# Altium PCB TST.PcbDoc
Units mm, origin at the board's own origin, x right, y up, seen from the top; angles counter-clockwise.
Board outline 25 x 25 mm, 2 copper layers (Top Layer, Bottom Layer), stack 0.266 mm thick; 5 components, 22 nets, 16 pads, 33 vias.
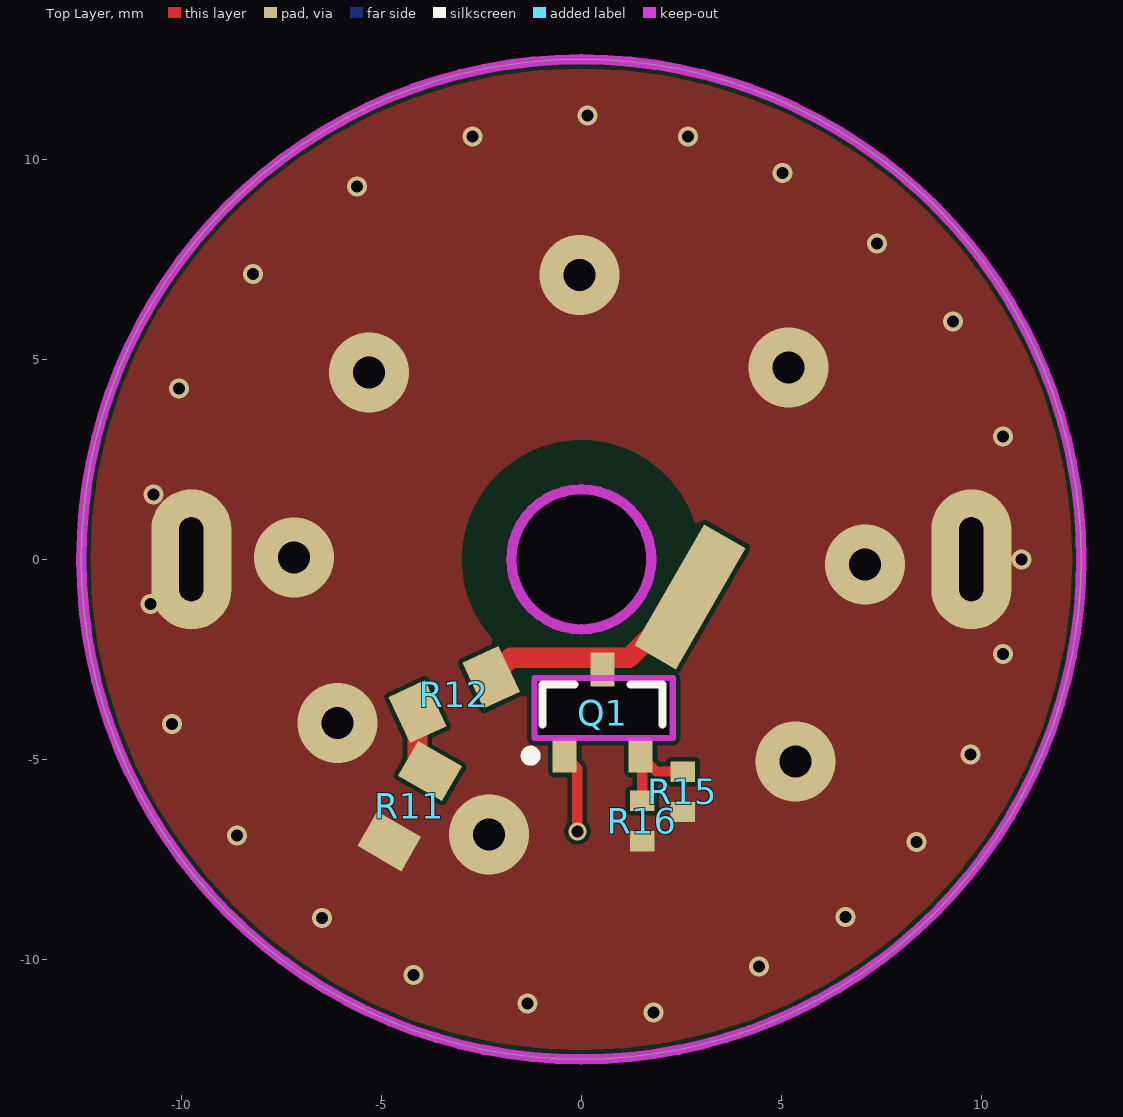
[diagram p0: Top Layer view]
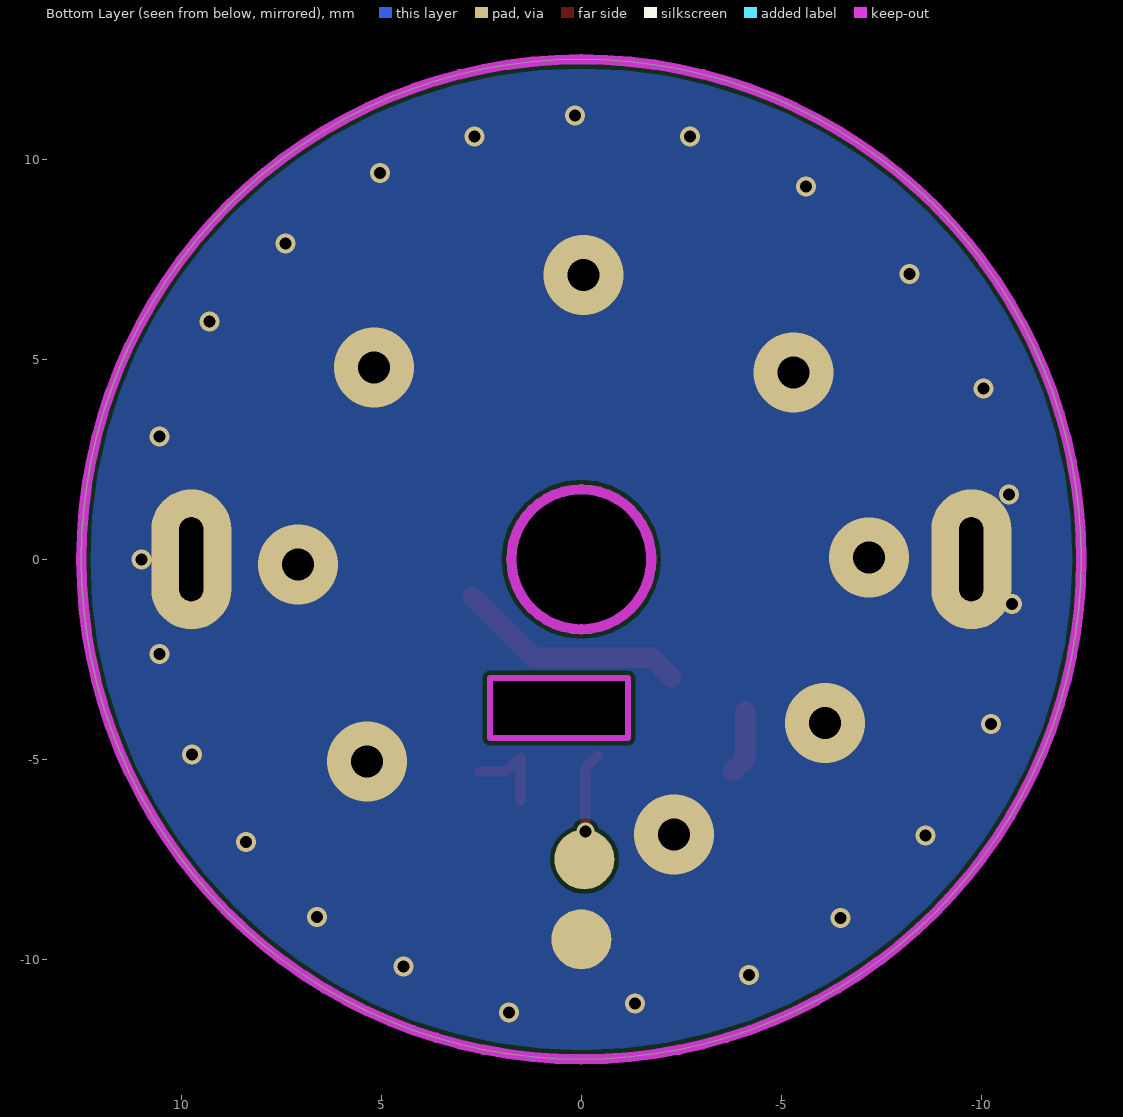
[diagram p1: Bottom Layer view, seen from below]

## Layer stack, top to bottom
Top Solder: solder mask 0.0102, Solder Resist, Dk 3.5
Top Layer: signal copper 0.0356
Dielectric1: core 0.195, FR-4, Dk 4.2
Bottom Layer: signal copper 0.0356
Bottom Solder: solder mask 0.0102, Solder Resist, Dk 3.5

## Board outline
0,-12.5 cw(c0,0) -12.5,0 cw(c0,0) 0,12.5 cw(c0,0) 12.5,0 cw(c0,0)
cut-out: -1.168,-4.47 2.286,-4.47 2.286,-2.972 -1.168,-2.972
cut-out: 0,-1.75 cw(c0,0) -1.75,0 cw(c0,0) 0,1.75 cw(c0,0) 1.75,0 cw(c0,0)

## Design rules (kind name [scope] priority, off if disabled: settings)
Clearance Clearance_1 [InNetClass('50R') vs InPolygon] p1: gap=0.508 ignorepadtopadclearanceinfootprint=FALSE except(0: Arc-Hole Track-Hole SMDPad-Hole THPad-Hole Via-Hole Fill-Hole Poly-Hole Region-Hole Text-Hole)
Clearance [All] p2: gap=0.102 ignorepadtopadclearanceinfootprint=FALSE
DiffPairsRouting [All] p1: maxlimit=0.254 minlimit=0.152 mostfreqgap=0.152 toplayer_minwidth=0.152 toplayer_maxwidth=0.381 toplayer_prefwidth=0.152 bottomlayer_minwidth=0.152 bottomlayer_maxwidth=0.381 bottomlayer_prefwidth=0.152 maxuncoupledlength=12.7
FanoutControl Fanout_Default [All] p5: bgadir=Out bgaviamode=Closest fanoutstyle=Auto fanoutdirection=Alternating viagrid=0.025 // Fanout_Default (Default Rule)
MinimumSolderMaskSliver [All] p1 off: minsoldermaskwidth=0.254
PlaneClearance [All] p1: clearance=0.152
PlaneConnect [All] p1: planeconnectstyle=Direct reliefexpansion=0.508 reliefentries=4 reliefconductorwidth=0.254 reliefairgap=0.254
PolygonConnect [All] p1: connectstyle=Direct reliefconductorwidth=0.254 reliefentries=4 polygonreliefangle="90 Angle" airgapwidth=0.254
RoomDefinition PSRR [InComponentClass('PSRR')] p1 off: confinementstyle=ConfineIn formatcopy=TRUE lockcomponents=FALSE outline 6.295,12.093 92.401,12.093 92.401,16.614 6.295,16.614
RoutingVias [All] p1: holewidth=0.2 width=0.45 viastyle="Through Hole" minholewidth=0.2 minwidth=0.45 maxholewidth=0.508 maxwidth=1.27
SilkToSilkClearance [All] p1 off: silktosilkclearance=0.254
SilkToSolderMaskClearance [IsPad] p1 off: minsilkscreentomaskgap=0.254 clearancetoexposedcopper=TRUE
SolderMaskExpansion [All] p1 off: expansion=0.076
Width Width_1 [InNet('3.3') or InNet('GND')] p1: maxlimit=5.08 minlimit=0.089 preferedwidth=0.089
Width [All] p2: maxlimit=2.54 minlimit=0.089 preferedwidth=0.089
23 further rules are at their usual default settings.

## Classes and differential pairs
component class PSRR: T6 U29

## Components (designator, comment, footprint, x,y, rotation, side; value= is the part's Value field where it differs from the comment)
Q1 "JFET-N" SOT-23_L 0.533,-3.835 r90 top
R11 "1k" 0805 -4.293,-6.172 r240 top
R12 "1k" 0805 -3.175,-3.378 r25 top (schematic designator R11)
R15 "10k" 0402 2.54,-5.817 r90 top value=0Ohm
R16 "10k" 0402 1.524,-6.545 r90 top value=0Ohm (schematic designator R15)

## Footprints (in the part's own frame and the unit in brackets; to place one, negate y for a bottom-side part, rotate by r counter-clockwise, add the part's x,y. Pads: shape width x height; smd on the part's side, far side on the other; paste and mask are expansions set on the pad)
0402 [mil] "0402-RES"
  rect 20x24 smd: 1(-19.69,0) 2(20,0)
0805 [mm]
  rect 1x1.27 smd: 1(-1.016,0) 2(1.016,0)
  body extent -1.27,-0.76 1.27,0.76, height 0.8
SOT-23_L [mm] "SOT23, 3-Leads, Body 2.9x1.3mm, Pitch 0.95mm, Lead Span 2.5mm, IPC High Density"
  rect 0.85x0.6 smd: 1(-1.075,0.95) 2(-1.075,-0.95) 3(1.075,0)
  silkscreen extent -1.2,-1.5 0.7,1.92, body extent -0.7,-1.5 0.7,1.5, height 1.1

## Part data
Q1: "N-Channel JFET", Code_JEDEC=TO-254-AA, LatestRevisionDate=17-Jul-2002, LatestRevisionNote="Re-released for DXP Platform.", PackageReference=TO-254-AA, Published=8-Jun-2000, Publisher="Altium Limited"
R11 R12 R15 R16: library part Res2, "Resistor", LatestRevisionDate=17-Jul-2002, LatestRevisionNote="Re-released for DXP Platform.", PackageDescription="Axial Device, Thru-Hole; 2 Leads; 0.4 in Pin Spacing", PackageReference=AXIAL-0.4, Published=8-Jun-2000, Publisher="Altium Limited"

## Free pads (board coordinates)
  oval 2x3.5 hole 0.6 slot 2.1 at 90 deg: 0(-9.75,0) 0(9.75,0)
  rect 1.2x3.5 smd rot 150: 1(2.718,-0.94)
  round 1.5 smd far side: 2(-0.076,-7.5) 3(0,-9.5)

## Via types
v1: diameter 0.5, hole 0.3, Top Layer to Bottom Layer, tented both sides, 24 vias
v2: diameter 2, hole 0.8, Top Layer to Bottom Layer, tented both sides, 8 vias
v3: diameter 0.45, hole 0.3, Top Layer to Bottom Layer, 1 vias

## Nets (pads, with @x,y where several pads share a name; then routed paths per layer and width w, separated by ;. In a path a pad name is that pad's centre, name@x,y a point inside that pad or via, vN(x,y) a via of type N, cw(c..) or ccw(c..) an arc to the next point about the centre after c; other vN are vias at no path point)
5V: 
D0-15: pad.2 Q1.1 | length 2
  Top Layer w0.254: Q1.1 -0.1,-5.227 v3(-0.1,-6.8)
D16-32: 
G1: pad.1 Q1.3 R12.2 | length 5.8
  Top Layer w0.508: R12.2 -1.769,-2.464 1.194,-2.464 pad.1
G2: 
GND: pad.0 pad.3 R11.2 R15.1 R16.1
  other v1: 1.803,-11.328 -1.346,-11.1 -4.191,-10.389 4.445,-10.185 -6.477,-8.966 6.604,-8.941 8.382,-7.061 -8.611,-6.909 9.728,-4.877 -10.236,-4.115 10.541,-2.362 -10.77,-1.118 11,0 -10.693,1.626 10.541,3.073 -10.058,4.267 9.296,5.944 -8.204,7.137 7.391,7.899 -5.613,9.322 5.029,9.652 -2.718,10.566 2.667,10.566 0.152,11.1
  other v2: -2.311,-6.883 5.359,-5.055 -6.096,-4.089 7.087,-0.127 -7.188,0.051 -5.309,4.674 5.182,4.801 -0.051,7.112
NetC2_2: R11.1 R12.1 | length 1.6
  Top Layer w0.508: R12.1 -4.096,-4.981 R11.1
NetC3_2: 
NetC6_2: 
NetC10_1: 
NetC12_1: 
NetC13_2: 
NetC23_2: 
NetOP2_2: 
NetOP2_8: 
NetOP2_13: 
PSRR_IN: Q1.2 R15.2 R16.2 | length 2.2
  Top Layer w0.254: R16.2 1.524,-4.951 1.882,-5.309 R15.2
PSRR_OUT: 
USB: 
USB3: 
VCC: 
VREF: 

## Polygon pours and split planes (outlines as drawn)
GND on Bottom Layer "GND_L02_P012" (solid, remove dead copper, pour order 12): 0,-12.5 cw(c0,0) -12.5,0 cw(c0,0) 0,12.5 cw(c0,0) 12.5,0 cw(c0,0)
GND on Top Layer "GND_L01_P010" (solid, remove dead copper, pour order 10): 0,-12.5 cw(c0,0) -12.5,0 cw(c0,0) 0,12.5 cw(c0,0) 12.5,0 cw(c0,0)

## Keep-outs
Keep-Out Layer:
  circle w0.254: c0,0 r1.75
  circle w0.254: c0,0 r12.5
  lines w0.152: -1.168,-4.47 2.286,-4.47 2.286,-2.972 -1.168,-2.972 -1.168,-4.47

## Other copper
Top Layer:
  pour cut-out: 0,-2.973 cw(c0,0) -2.973,0 cw(c0,0) 0,2.973 cw(c0,0) 2.973,0 cw(c0,0)

## Silkscreen, mask and mechanical layers (free items; w line width, h text height)
Top Solder:
  circle w2: c0,0 r11
Bottom Solder:
  circle w2: c0,0 r5